# Altium PCB RHD2132_64CH.PcbDoc
Units mm, origin at the board's own origin, x right, y up, seen from the top; angles counter-clockwise.
Board outline 26.67 x 34.29 mm, 6 copper layers (Top Layer, Ground Plane 1, Third Layer, Fourth Layer, Ground Plane 2, Bottom Layer), stack 1.484 mm thick; 15 components, 79 nets, 238 pads, 39 vias.
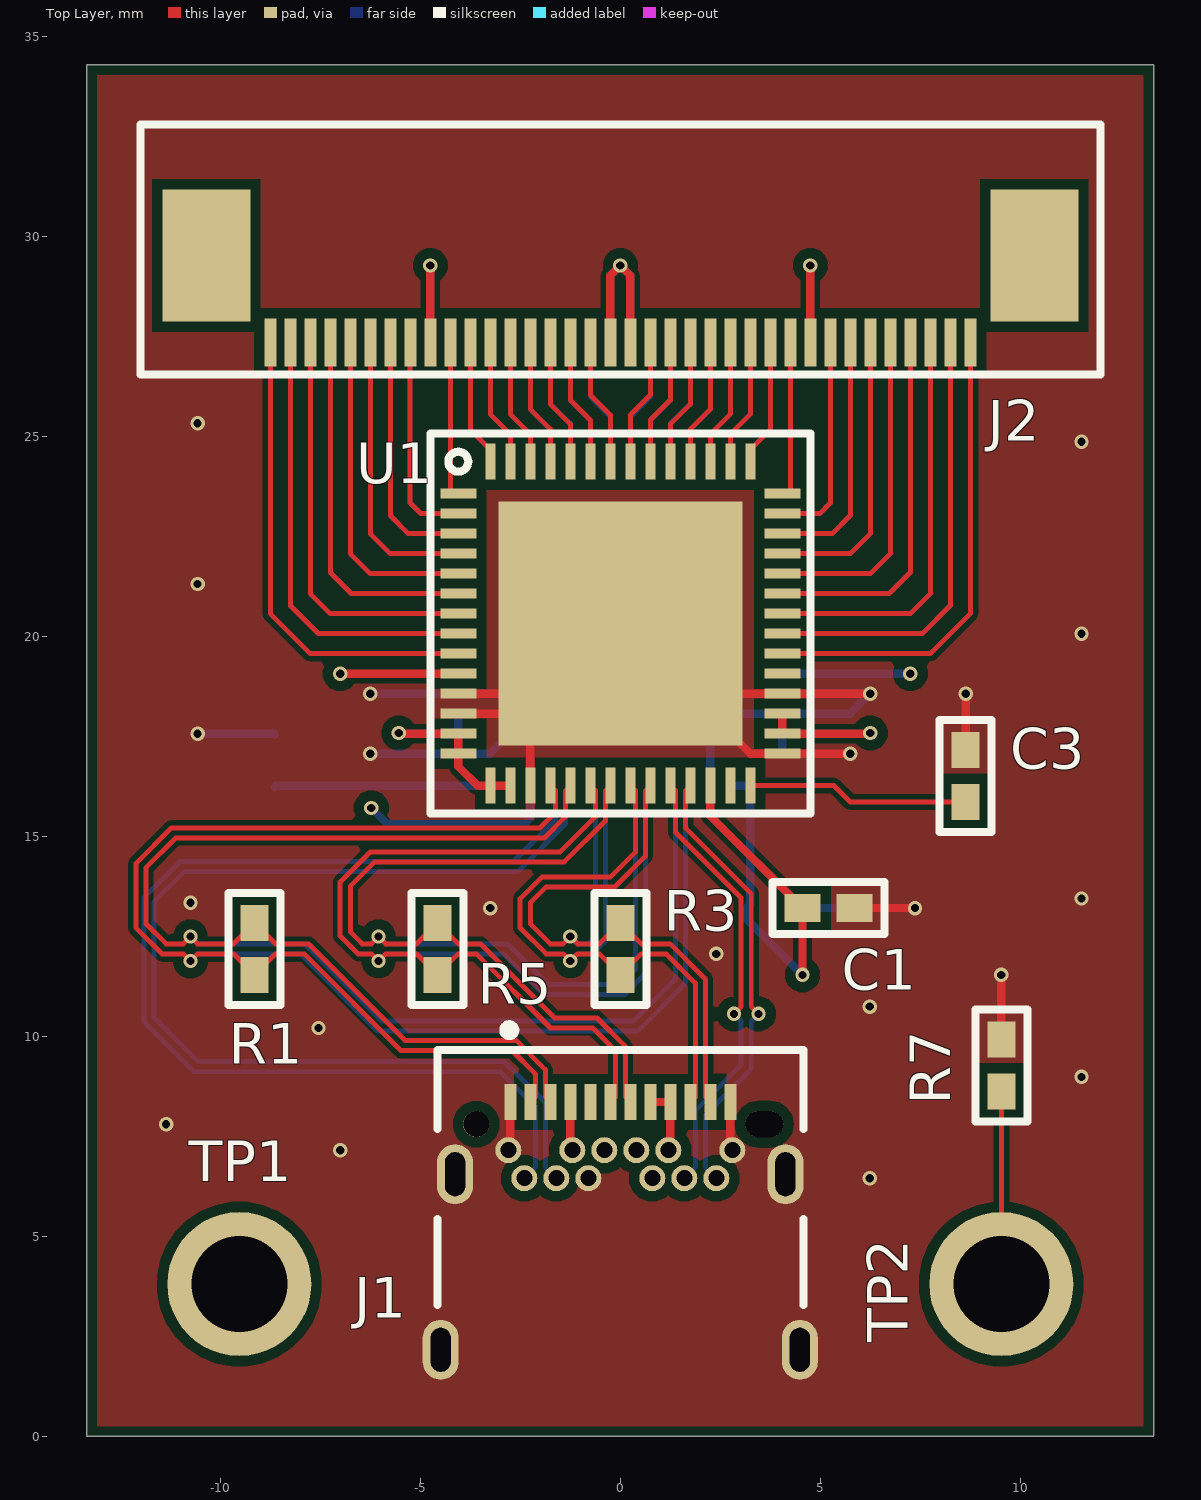
[diagram p0: Top Layer view]
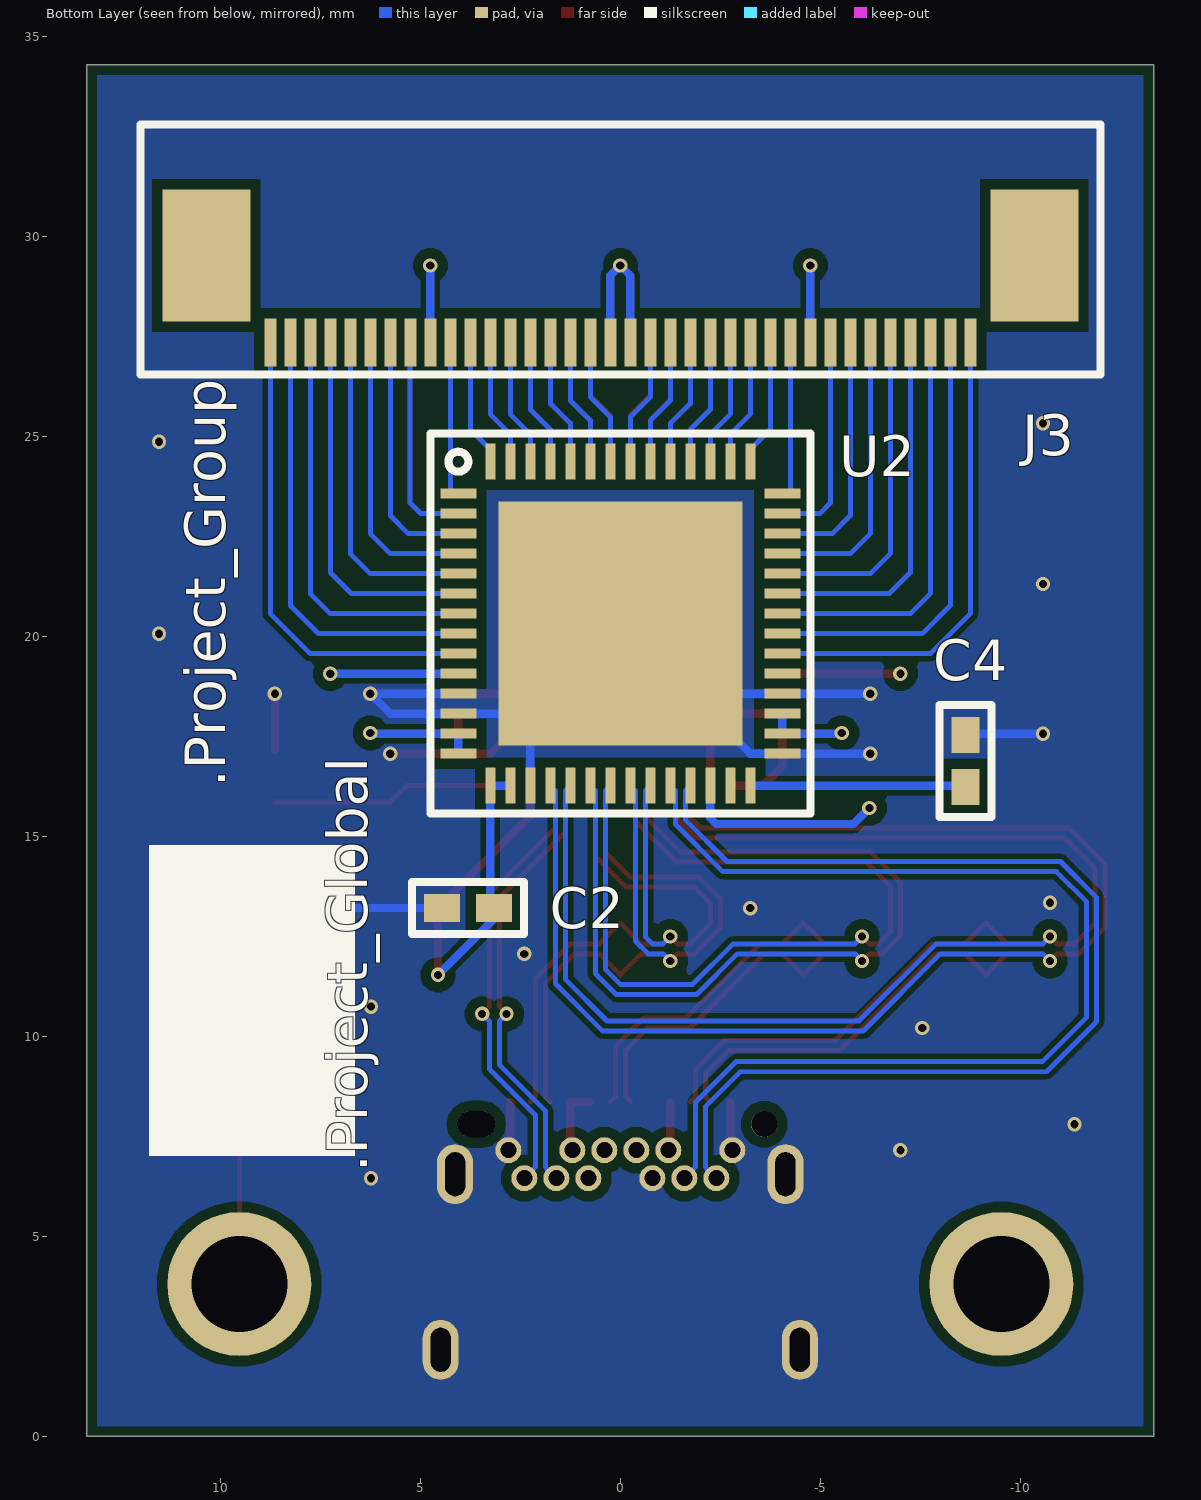
[diagram p1: Bottom Layer view, seen from below]
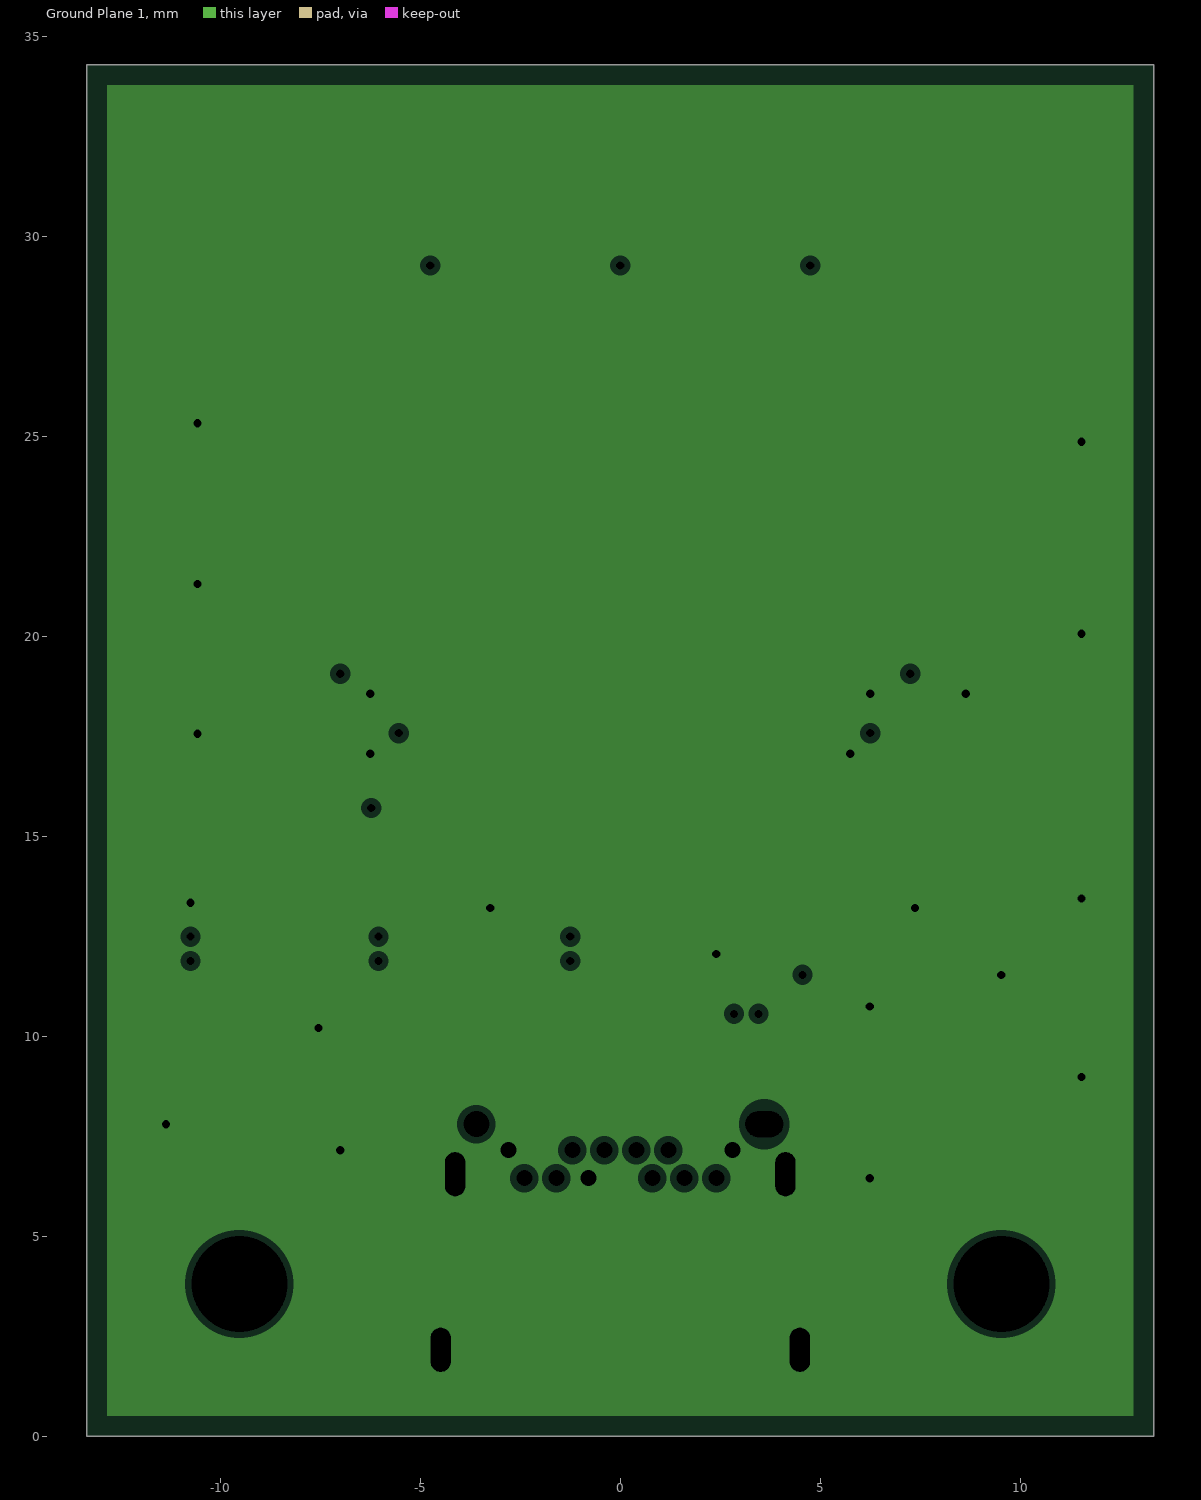
[diagram p2: Ground Plane 1, clearances drawn from the general rule]
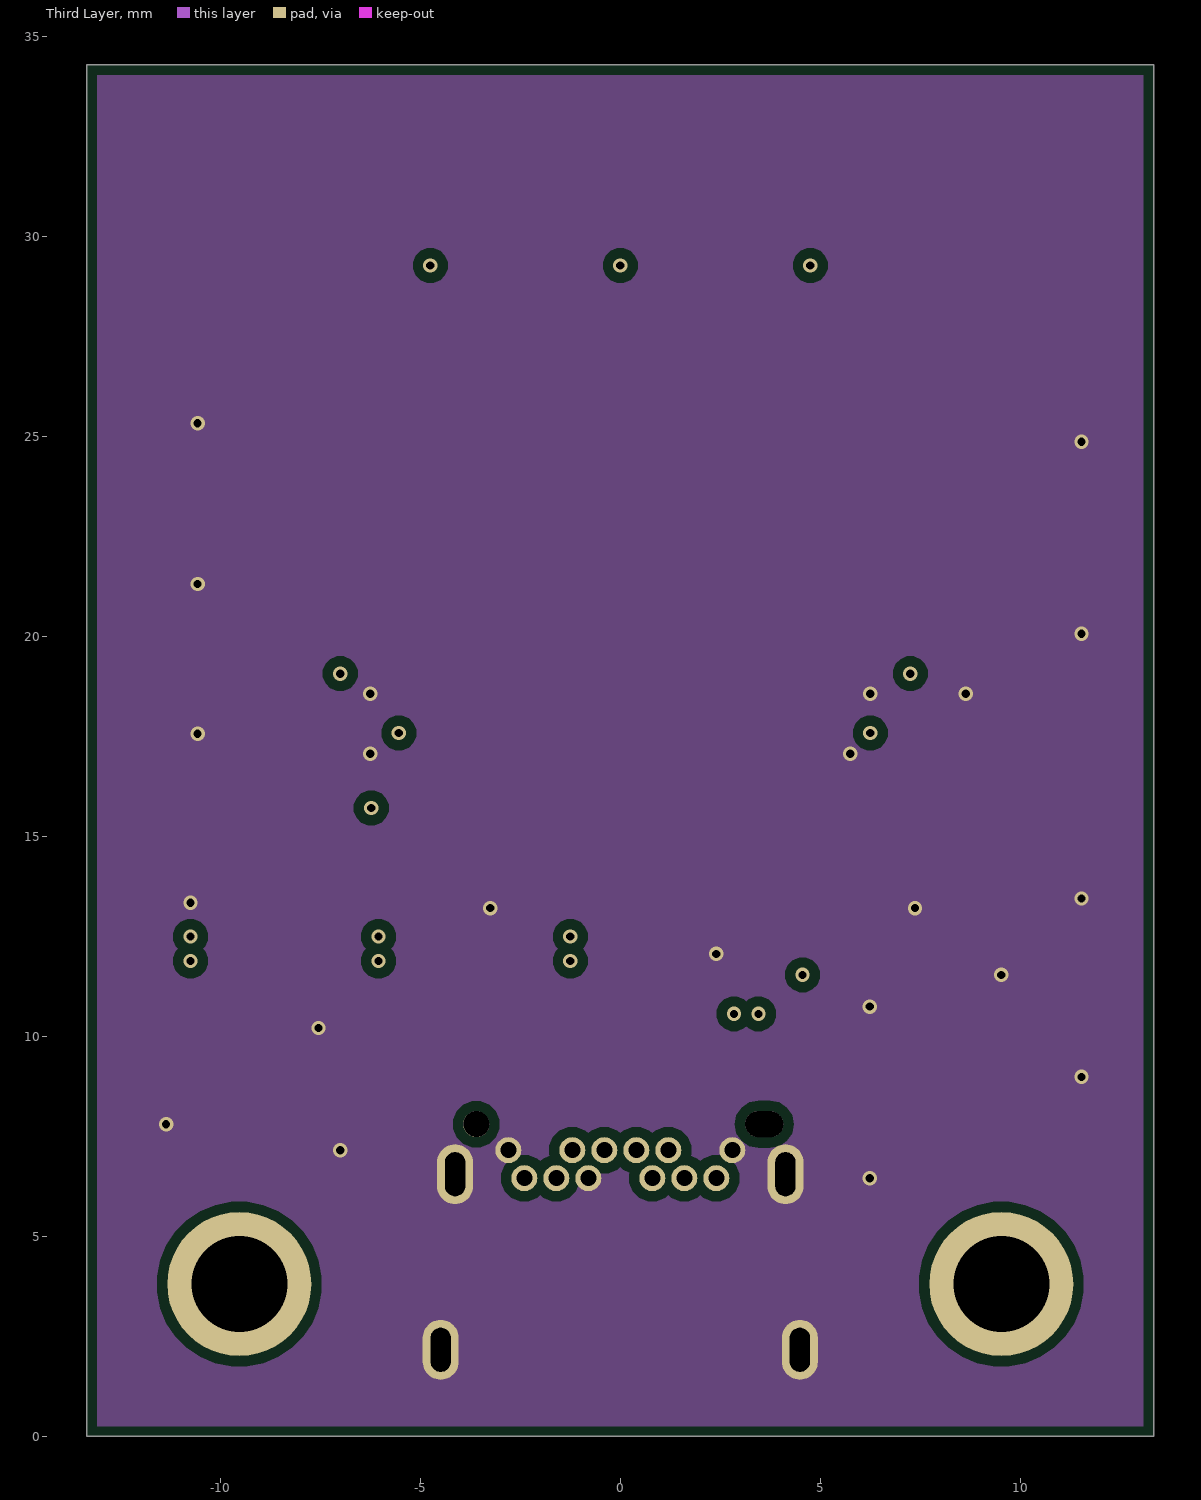
[diagram p3: Third Layer]
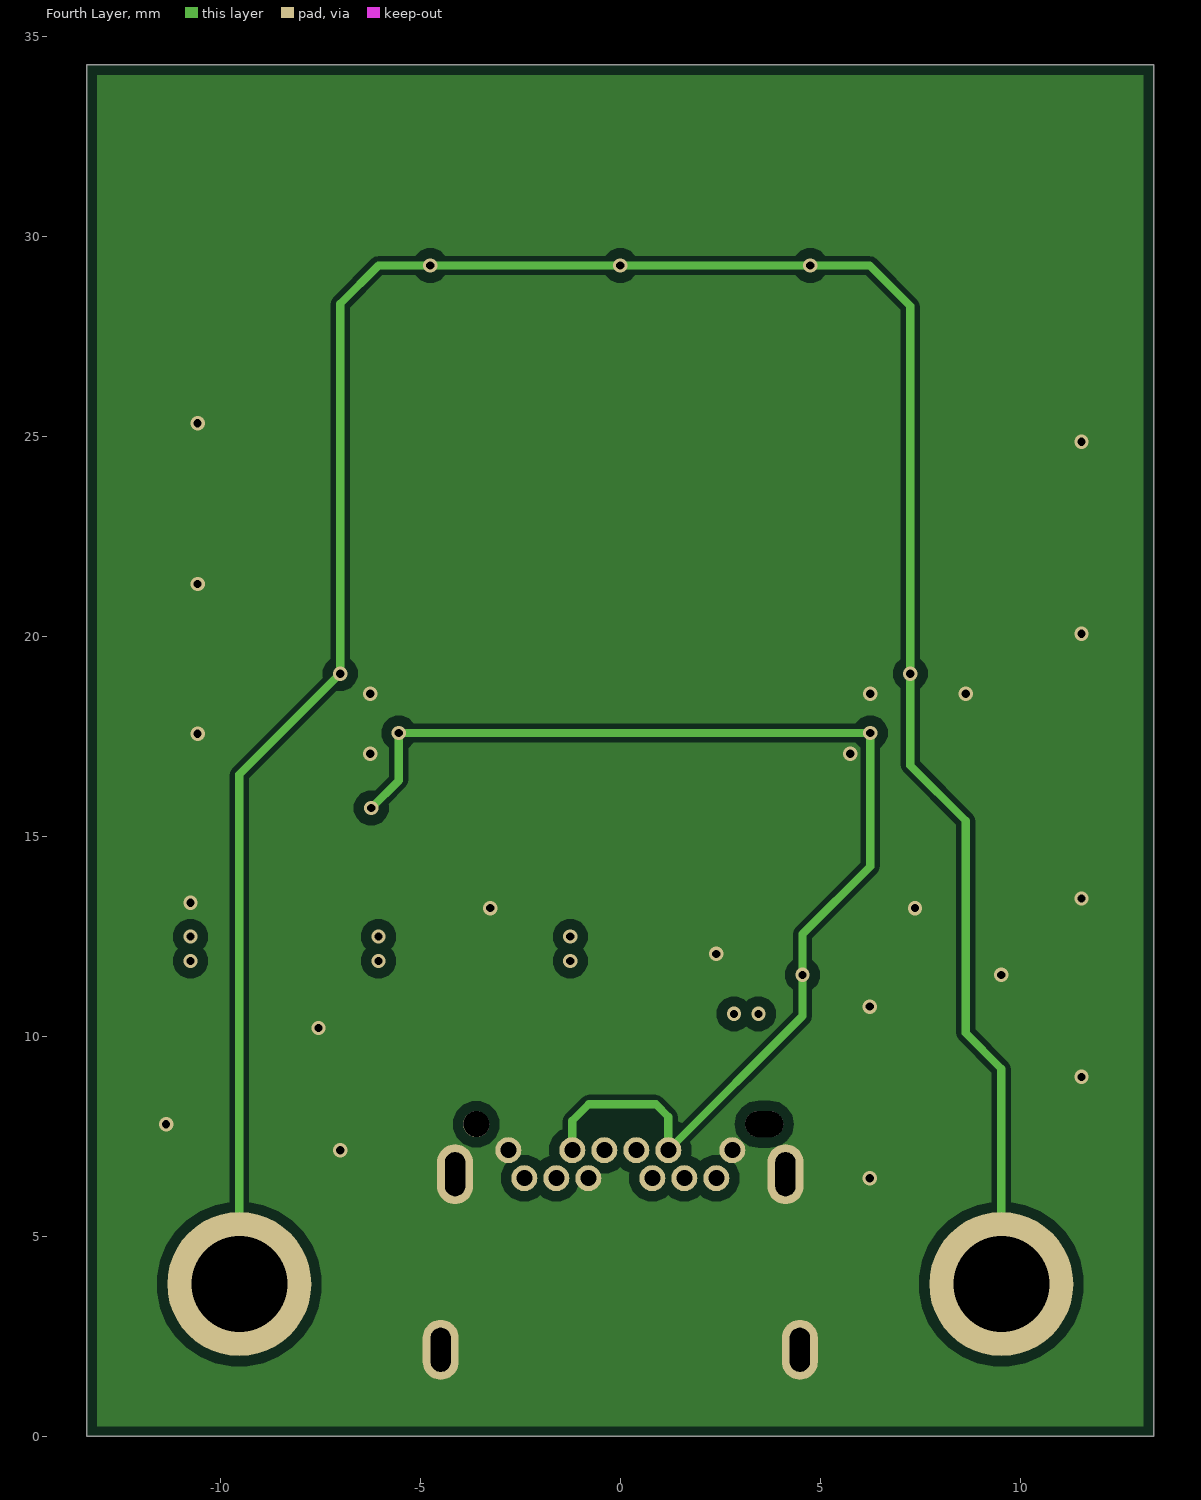
[diagram p4: Fourth Layer]
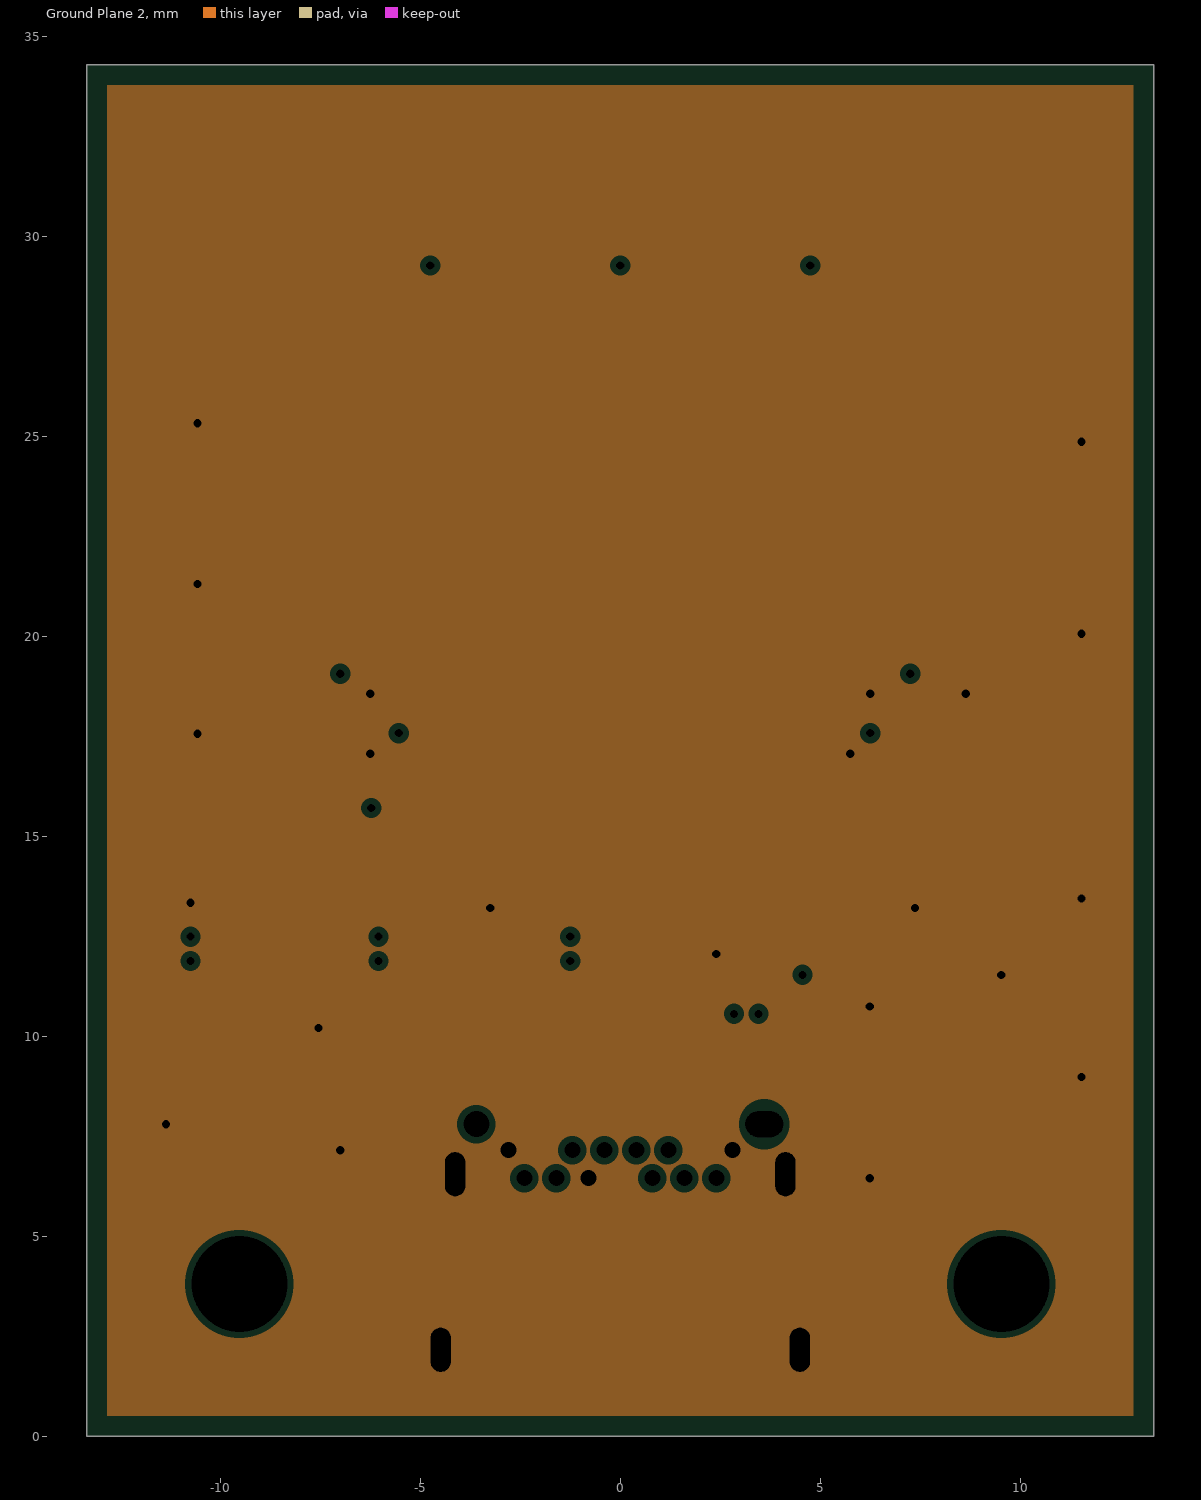
[diagram p5: Ground Plane 2, clearances drawn from the general rule]

## Layer stack, top to bottom
Top Solder: solder mask 0.01, Solder Resist, Dk 3.5
Top Layer: signal copper 0.035
Dielectric 4: prepreg 0.1195, 2116 RC58%, Dk 4.45
Ground Plane 1: plane copper 0.035, net GND
Dielectric 2: core 0.43, Core, Dk 4.6
Third Layer: signal copper 0.035
Dielectric 1: prepreg 0.175, 7628 RC46%, Dk 4.74
Fourth Layer: signal copper 0.035
Dielectric 3: core 0.43, Core, Dk 4.6
Ground Plane 2: plane copper 0.035, net GND
Dielectric 5: prepreg 0.1195, 2116 RC58%, Dk 4.45
Bottom Layer: signal copper 0.035
Bottom Solder: solder mask 0.01, Solder Resist, Dk 3.5

## Board outline
-13.335,0 -13.335,34.29 13.335,34.29 13.335,0

## Design rules (kind name [scope] priority, off if disabled: settings)
AcuteAngle [All] p1: minimum=4.50000000000000E+0001 checktracksonly=FALSE
BoardOutlineClearance [All] p1: gap=0.254 ignorepadtopadclearanceinfootprint=FALSE
Clearance [All] p1: gap=0.254 ignorepadtopadclearanceinfootprint=TRUE except(0.127: Arc-Arc Arc-Track Arc-SMDPad Arc-THPad Arc-Via Arc-Fill Arc-Poly Arc-Region Arc-Text Arc-Hole Track-Track Track-SMDPad Track-THPad Track-Via Track-Fill Track-Poly Track-Region Track-Text Track-Hole)
ComponentClearance [All] p1: gap=0.102 collisioncheckmode=3 verticalgap=0.102 showdistances=FALSE
DiffPairsRouting [All] p1: maxlimit=0.203 minlimit=0.127 mostfreqgap=0.203 toplayer_maxgap=0.127 toplayer_prefgap=0.127 toplayer_minwidth=0.124 toplayer_maxwidth=0.124 toplayer_prefwidth=0.124 midlayer1_minwidth=0.381 midlayer1_maxwidth=0.381 midlayer1_prefwidth=0.381 midlayer2_mingap=0.203 midlayer2_minwidth=0.102 midlayer2_maxwidth=0.102 midlayer2_prefwidth=0.102 bottomlayer_maxgap=0.127 bottomlayer_prefgap=0.127 bottomlayer_minwidth=0.124 bottomlayer_maxwidth=0.124 bottomlayer_prefwidth=0.124 impedanceprofiledriven=TRUE impedanceprofileid={EA2CEC0D-C804-4875-A771-53543DD9646E} maxuncoupledlength=5.08
HoleSize [All] p1: absolutevalues=TRUE maxlimit=25.4 minlimit=0.152 maxpercent=80.000 minpercent=20.000
HoleToHoleClearance [All] p1: gap=0.203 allowstackedmicrovias=FALSE
MatchedLengths [All] p1: tolerance=1.27 checknetsindiffpair=TRUE checkdiffpairvsdiffpair=FALSE checkxsignals=FALSE checkothers=FALSE
MinimumAnnularRing [All] p1: minimumring=0.076
MinimumSolderMaskSliver MinimumSolderMaskSliver_U1 [HasFootprint('RHD2164_BGA')] p1: minsoldermaskwidth=0.025
MinimumSolderMaskSliver [All] p2: minsoldermaskwidth=0.102
PlaneClearance [All] p1: clearance=0.152
PlaneConnect [All] p1: planeconnectstyle=Direct reliefexpansion=0.508 reliefentries=4 reliefconductorwidth=0.254 reliefairgap=0.254
PolygonConnect [All] p1: connectstyle=Direct reliefconductorwidth=0.203 reliefentries=4 polygonreliefangle="90 Angle" airgapwidth=0.102
RoutingLayers [All] p1: top layer_v5=TRUE mid layer 1_v5=FALSE mid layer 2_v5=TRUE bottom layer_v5=TRUE
RoutingVias [All] p1: holewidth=0.203 width=0.356 viastyle="Through Hole" minholewidth=0.152 minwidth=0.356 maxholewidth=0.203 maxwidth=0.356
SilkToSilkClearance [All] p1: silktosilkclearance=0.102
SilkToSolderMaskClearance [IsPad] p1: minsilkscreentomaskgap=0.051 clearancetoexposedcopper=FALSE
SolderMaskExpansion SolderMaskExpansion_Vias [IsVia] p1: expansion=-0.254 istentingtop=TRUE
SolderMaskExpansion [All] p2: expansion=0.051 istentingtop=FALSE
SupplyNets "Schematic Supply Nets_2" [InNet('VDD_3V3')] p1: voltage=0.000
SupplyNets "Schematic Supply Nets_1" [InNet('GND')] p2: voltage=0.000
Width Width_Power [InNetClass('Power')] p1: maxlimit=0.508 minlimit=0.152 preferedwidth=0.203
Width [All] p2: maxlimit=0.381 minlimit=0.127 preferedwidth=0.127 midlayer1_maxwidth=0.254 minimp=50.000000 maximp=50.000000 favimp=50.000000
20 further rules are at their usual default settings.

## Classes and differential pairs
differential pair SCLK: +SCLK_P -SCLK_N
differential pair MOSI: +MOSI_P -MOSI_N
differential pair MISO2: +MISO2_P -MISO2_N
differential pair MISO1: +MISO1_P -MISO1_N
differential pair C\S\: +C\S\_P -C\S\_N

## Components (designator, comment, footprint, x,y, rotation, side; value= is the part's Value field where it differs from the comment)
C1 "100n" 0402_CAPACITOR 5.207,13.208 r180 top
C2 "100n" 0402_CAPACITOR 3.81,13.208 r180 bottom
C3 "10n" 0402_CAPACITOR 8.636,16.51 r270 top
C4 "10n" 0402_CAPACITOR -8.636,16.891 r270 bottom
J1 "217183-0001" FP-217183-0001-MFG 0,4.572 r0 top locked
J2 "3-2492104-6" CON_ZIF_RA_36POS 0,27.354 r180 top locked
J3 "3-2492104-6" CON_ZIF_RA_36POS 0,27.354 r0 bottom locked
R1 "100R" 0402_Resistor -9.144,12.192 r90 top
R3 "100R" 0402_Resistor 0,12.192 r90 top
R5 "100R" 0402_Resistor -4.572,12.192 r90 top
R7 "0R00" 0402_Resistor 9.525,9.271 r270 top
TP1 "TP_Small" TP_Small_M2 -9.525,3.81 r0 top
TP2 "TP_Small" TP_Small_M2 9.525,3.81 r0 top
U1 "RHD2132" QFN-56 0,20.32 r0 top locked
U2 "RHD2132" QFN-56 0,20.32 r180 bottom locked

## Footprints (in the part's own frame and the unit in brackets; to place one, negate y for a bottom-side part, rotate by r counter-clockwise, add the part's x,y. Pads: shape width x height; smd on the part's side, far side on the other; paste and mask are expansions set on the pad)
0402_CAPACITOR [mm]
  rect 0.9x0.7 smd: 1(-0.65,0) 2(0.65,0)
  silkscreen extent -1.4,-0.65 1.4,0.65
0402_Resistor [mm]
  rect 0.9x0.7 smd: 1(-0.65,0) 2(0.65,0)
  silkscreen extent -1.4,-0.65 1.4,0.65
CON_ZIF_RA_36POS [mm] "3-2492104-6 / 36 Position FPC Connector Contacts, Bottom 0.020\" (0.50mm) Surface Mount, Right Angle"
  rect 0.3x1.2 smd mask+0.025: 1(-8.75,0) 2(-8.25,0) 3(-7.75,0) 4(-7.25,0) 5(-6.75,0) 6(-6.25,0) 7(-5.75,0) 8(-5.25,0) 9(-4.75,0) 10(-4.25,0) 11(-3.75,0) 12(-3.25,0) 13(-2.75,0) 14(-2.25,0) 15(-1.75,0) 16(-1.25,0) 17(-0.75,0) 18(-0.25,0) 19(0.25,0) 20(0.75,0) 21(1.25,0) 22(1.75,0) 23(2.25,0) 24(2.75,0) 25(3.25,0) 26(3.75,0) 27(4.25,0) 28(4.75,0) 29(5.25,0) 30(5.75,0) 31(6.25,0) 32(6.75,0) 33(7.25,0) 34(7.75,0) 35(8.25,0) 36(8.75,0)
  rect 2.2x3.3 smd mask+0.025: M1(-10.35,-2.17) M2(10.35,-2.17)
  silkscreen extent -12,-5.45 12,0.8, body extent -11.8,-5.25 11.8,0.5, height 2
FP-217183-0001-MFG [mm]
  rrect100% 0.9x1.5 hole 1.1 slot 0.5 at 0 deg paste-2539.97 mask+0: 1(-4.13,1.985) 2(4.13,1.985) 3(-4.49,-2.405) 4(4.49,-2.405)
  rect 0.3x0.9 smd paste+0 mask+0: A1(-2.75,3.795) A2(-2.25,3.795) A3(-1.75,3.795) A4(-1.25,3.795) A5(-0.75,3.795) A6(-0.25,3.795) A7(0.25,3.795) A8(0.75,3.795) A9(1.25,3.795) A10(1.75,3.795) A11(2.25,3.795) A12(2.75,3.795)
  round 0.65 hole 0.4 paste-2539.97 mask+0: B1(2.8,2.585) B2(2.4,1.885) B3(1.6,1.885) B4(1.2,2.585) B5(0.8,1.885) B6(0.4,2.585) B7(-0.4,2.585) B8(-0.8,1.885) B9(-1.2,2.585) B10(-1.6,1.885) B11(-2.4,1.885) B12(-2.8,2.585)
  round 0.65 hole 0.65 unplated paste-2539.97 mask+0: ""(-3.6,3.235)
  rrect100% 0.95x0.65 hole 0.65 slot 0.95 at 0 deg unplated paste-2539.97 mask+0: ""(3.6,3.235)
  silkscreen extent -4.57,-1.28 4.57,5.71, body extent -5.04,-5.19 5.04,5.19, height 0.25
QFN-56 [mm] "56 Pin QFN Package"
  rect 0.9x0.25 smd mask+0.051: 1(-4.05,3.25) 2(-4.05,2.75) 3(-4.05,2.25) 4(-4.05,1.75) 5(-4.05,1.25) 6(-4.05,0.75) 7(-4.05,0.25) 8(-4.05,-0.25) 9(-4.05,-0.75) 10(-4.05,-1.25) 11(-4.05,-1.75) 12(-4.05,-2.25) 13(-4.05,-2.75) 14(-4.05,-3.25) 29(4.05,-3.25) 30(4.05,-2.75) 31(4.05,-2.25) 32(4.05,-1.75) 33(4.05,-1.25) 34(4.05,-0.75) 35(4.05,-0.25) 36(4.05,0.25) 37(4.05,0.75) 38(4.05,1.25) 39(4.05,1.75) 40(4.05,2.25) 41(4.05,2.75) 42(4.05,3.25)
  rect 0.25x0.9 smd mask+0.051: 15(-3.25,-4.05) 16(-2.75,-4.05) 17(-2.25,-4.05) 18(-1.75,-4.05) 19(-1.25,-4.05) 20(-0.75,-4.05) 21(-0.25,-4.05) 22(0.25,-4.05) 23(0.75,-4.05) 24(1.25,-4.05) 25(1.75,-4.05) 26(2.25,-4.05) 27(2.75,-4.05) 28(3.25,-4.05) 43(3.25,4.05) 44(2.75,4.05) 45(2.25,4.05) 46(1.75,4.05) 47(1.25,4.05) 48(0.75,4.05) 49(0.25,4.05) 50(-0.25,4.05) 51(-0.75,4.05) 52(-1.25,4.05) 53(-1.75,4.05) 54(-2.25,4.05) 55(-2.75,4.05) 56(-3.25,4.05)
  rect 6.1x6.1 smd mask+0.051: 57(0,0)
  silkscreen extent -4.75,-4.75 4.75,4.75, body extent -4,-4 4,4, height 0.85
TP_Small_M2 [mm]
  round 3.6 hole 2.4: 1(0,0)

## Part data
C1 C2 C3 C4: library part Capacitor, "Capacitor"
J1: library part CON_USBC_TH_SMT, "USB-C (USB TYPE-C) USB 3.2 Gen 1 (USB 3.1 Gen 1, Superspeed (USB 3.0)) Receptacle Connector 24 Position Through Hole, Right Angle"
J2 J3: library part CON_ZIF_RA_36POS, "36 Position FPC Connector Contacts, Bottom 0.020\" (0.50mm) Surface Mount, Right Angle", GRAMS Lib Spec=2.7
R1 R3 R5 R7: library part Resistor, "Resistor", GRAMS Lib Spec=2.7
TP1 TP2: "Through Hole Test Point - M2"
U1 U2: library part IC_RHD2132, "INTAN RHD2132 - 56-QFN", GRAMS Lib Spec=2.7

## Via types
v1: diameter 0.356, hole 0.203, Top Layer to Bottom Layer, tented both sides, 39 vias

## Nets (pads, with @x,y where several pads share a name; then routed paths per layer and width w, separated by ;. In a path a pad name is that pad's centre, name@x,y a point inside that pad or via, vN(x,y) a via of type N, cw(c..) or ccw(c..) an arc to the next point about the centre after c; other vN are vias at no path point)
C\S\_N: J1.A2 R1.1 U1.18 U2.18 | length 44.9
  Top Layer w0.124: J1.A2 -2.126,8.491 -2.126,9.068 -2.709,9.651 -5.485,9.651 -7.901,12.066 -8.62,12.066 R1.1 -9.668,12.066 -10.565,12.066 v1(-10.744,11.887) -10.923,12.066 -11.458,12.066 -12.113,12.722 -12.113,14.32 -11.219,15.215 -2.007,15.215 -1.626,15.596 -1.626,16.146 U1.18
  Bottom Layer w0.124: v1(-10.744,11.887) -10.565,12.066 -8.001,12.066 -6.069,10.135 0.437,10.135 1.626,11.323 1.626,16.146 U2.18
C\S\_P: J1.A3 R1.2 U1.19 U2.19 | length 44.5
  Top Layer w0.124: J1.A3 -1.874,8.491 -1.874,9.172 -2.605,9.902 -5.381,9.902 -7.797,12.318 -8.62,12.318 R1.2 -9.668,12.318 -10.565,12.318 v1(-10.744,12.497) -10.923,12.318 -11.354,12.318 -11.862,12.826 -11.862,14.216 -11.115,14.963 -1.903,14.963 -1.374,15.491 -1.374,16.146 U1.19
  Bottom Layer w0.124: v1(-10.744,12.497) -10.565,12.318 -7.897,12.318 -5.965,10.386 0.333,10.386 1.374,11.427 1.374,16.146 U2.19
GND: C1.1 C2.1 C3.1 C4.1 J1.1 J1.2 J1.3 J1.4 J1.A1 J1.A12 J1.B1 J1.B8 J1.B12 R7.1 U1.11 U1.12 U1.17 U1.29 U1.32 U1.57 U2.11 U2.12 U2.17 U2.29 U2.32 U2.57 | length 47.2
  Top Layer w0.203: U1.12 -2.25,18.07 U1.17 ; U1.11 -1.75,18.57 U1.57 ; J1.B12 -2.75,7.207 J1.A1 ; J1.A12 2.75,7.207 J1.B1 ; v1(5.75,17.07) U1.29 3.25,17.07 1.75,18.57 U1.32 v1(6.25,18.57) ; C1.1 v1(7.366,13.208) ; C3.1 v1(8.636,18.57) ; R7.1 v1(9.525,11.542)
  Bottom Layer w0.203: v1(-10.566,17.57) -8.665,17.57 C4.1 ; v1(-6.25,17.07) U2.29 -3.25,17.07 -1.75,18.57 U2.32 v1(-6.25,18.57) ; U2.17 2.25,18.07 U2.12 5.75,18.07 v1(6.25,18.57) U2.11 ; C2.1 v1(7.366,13.208)
  other v1: 6.235,6.457 -7.001,7.157 -11.354,7.807 11.532,8.992 -7.548,10.211 6.235,10.745 2.4,12.066 -3.25,13.208 -10.744,13.343 11.532,13.447 11.532,20.07 -10.566,21.311 11.532,24.87 -10.566,25.331
INPUT0: J2.36 U1.9 | length 11.9
  Top Layer w0.127: J2.36 -8.75,20.57 -7.75,19.57 U1.9
INPUT1: J2.35 U1.8 | length 11.1
  Top Layer w0.127: J2.35 -8.25,20.772 -7.548,20.07 U1.8
INPUT2: J2.34 U1.7 | length 10.2
  Top Layer w0.127: J2.34 -7.75,21.07 -7.25,20.57 U1.7
INPUT3: J2.33 U1.6 | length 9.2
  Top Layer w0.127: J2.33 -7.25,21.601 -6.719,21.07 U1.6
INPUT4: J2.32 U1.5 | length 8.2
  Top Layer w0.127: J2.32 -6.75,22.07 -6.25,21.57 U1.5
INPUT5: J2.31 U1.4 | length 7.2
  Top Layer w0.127: J2.31 -6.25,22.57 -5.75,22.07 U1.4
INPUT6: J2.30 U1.3 | length 6.2
  Top Layer w0.127: J2.30 -5.75,23.022 -5.298,22.57 U1.3
INPUT7: J2.29 U1.2 | length 5.3
  Top Layer w0.127: J2.29 -5.258,27.346 -5.258,23.343 -4.985,23.07 U1.2
INPUT8: J2.27 U1.1 | length 4
  Top Layer w0.127: J2.27 -4.25,23.57 U1.1
INPUT9: J2.26 U1.56 | length 3.2
  Top Layer w0.127: J2.26 -3.75,25.167 -3.25,24.667 U1.56
INPUT10: J2.25 U1.55 | length 3.2
  Top Layer w0.127: J2.25 -3.25,25.558 -2.75,25.058 U1.55
INPUT11: J2.24 U1.54 | length 3.2
  Top Layer w0.127: J2.24 -2.75,25.558 -2.25,25.058 U1.54
INPUT12: J2.23 U1.53 | length 3.2
  Top Layer w0.127: J2.23 -2.25,25.682 -1.75,25.182 U1.53
INPUT13: J2.22 U1.52 | length 3.2
  Top Layer w0.127: J2.22 -1.75,25.807 -1.25,25.307 U1.52
INPUT14: J2.21 U1.51 | length 3.2
  Top Layer w0.127: J2.21 -1.25,25.914 -0.75,25.414 U1.51
INPUT15: J2.20 U1.50 | length 3.2
  Top Layer w0.127: J2.20 -0.75,26.038 -0.25,25.538 U1.50
INPUT16: J2.17 U1.49 | length 3.2
  Top Layer w0.127: U1.49 0.25,25.538 0.75,26.038 J2.17
INPUT17: J2.16 U1.48 | length 3.2
  Top Layer w0.127: U1.48 0.75,25.414 1.25,25.914 J2.16
INPUT18: J2.15 U1.47 | length 3.2
  Top Layer w0.127: U1.47 1.25,25.307 1.75,25.807 J2.15
INPUT19: J2.14 U1.46 | length 3.2
  Top Layer w0.127: U1.46 1.75,25.182 2.25,25.682 J2.14
INPUT20: J2.13 U1.45 | length 3.2
  Top Layer w0.127: U1.45 2.25,25.058 2.75,25.558 J2.13
INPUT21: J2.12 U1.44 | length 3.2
  Top Layer w0.127: U1.44 2.75,25.058 3.25,25.558 J2.12
INPUT22: J2.11 U1.43 | length 3.2
  Top Layer w0.127: U1.43 3.25,24.667 3.75,25.167 J2.11
INPUT23: J2.10 U1.42 | length 4
  Top Layer w0.127: U1.42 4.25,23.57 J2.10
INPUT24: J2.8 U1.41 | length 5.3
  Top Layer w0.127: U1.41 4.985,23.07 5.258,23.343 5.258,27.346 J2.8
INPUT25: J2.7 U1.40 | length 6.2
  Top Layer w0.127: U1.40 5.298,22.57 5.75,23.022 J2.7
INPUT26: J2.6 U1.39 | length 7.2
  Top Layer w0.127: U1.39 5.75,22.07 6.25,22.57 J2.6
INPUT27: J2.5 U1.38 | length 8.2
  Top Layer w0.127: U1.38 6.25,21.57 6.75,22.07 J2.5
INPUT28: J2.4 U1.37 | length 9.2
  Top Layer w0.127: U1.37 6.719,21.07 7.25,21.601 J2.4
INPUT29: J2.3 U1.36 | length 10.2
  Top Layer w0.127: U1.36 7.25,20.57 7.75,21.07 J2.3
INPUT30: J2.2 U1.35 | length 11.1
  Top Layer w0.127: U1.35 7.548,20.07 8.25,20.772 J2.2
INPUT31: J2.1 U1.34 | length 11.9
  Top Layer w0.127: U1.34 7.75,19.57 8.75,20.57 J2.1
INPUT32: J3.36 U2.9 | length 11.9
  Bottom Layer w0.127: U2.9 7.75,19.57 8.75,20.57 J3.36
INPUT33: J3.35 U2.8 | length 11.1
  Bottom Layer w0.127: U2.8 7.548,20.07 8.25,20.772 J3.35
INPUT34: J3.34 U2.7 | length 10.2
  Bottom Layer w0.127: U2.7 7.25,20.57 7.75,21.07 J3.34
INPUT35: J3.33 U2.6 | length 9.2
  Bottom Layer w0.127: U2.6 6.719,21.07 7.25,21.601 J3.33
INPUT36: J3.32 U2.5 | length 8.2
  Bottom Layer w0.127: U2.5 6.25,21.57 6.75,22.07 J3.32
INPUT37: J3.31 U2.4 | length 7.2
  Bottom Layer w0.127: U2.4 5.75,22.07 6.25,22.57 J3.31
INPUT38: J3.30 U2.3 | length 6.2
  Bottom Layer w0.127: U2.3 5.298,22.57 5.75,23.022 J3.30
INPUT39: J3.29 U2.2 | length 5.3
  Bottom Layer w0.127: U2.2 4.985,23.07 5.258,23.343 5.258,27.346 J3.29
INPUT40: J3.27 U2.1 | length 4
  Bottom Layer w0.127: U2.1 4.25,23.57 J3.27
INPUT41: J3.26 U2.56 | length 3.2
  Bottom Layer w0.127: U2.56 3.25,24.392 3.25,24.675 3.75,25.175 J3.26
INPUT42: J3.25 U2.55 | length 3.2
  Bottom Layer w0.127: U2.55 2.75,25.058 3.25,25.558 J3.25
INPUT43: J3.24 U2.54 | length 3.2
  Bottom Layer w0.127: U2.54 2.25,25.058 2.75,25.558 J3.24
INPUT44: J3.23 U2.53 | length 3.2
  Bottom Layer w0.127: U2.53 1.75,25.175 2.25,25.675 J3.23
INPUT45: J3.22 U2.52 | length 3.2
  Bottom Layer w0.127: U2.52 1.25,25.331 1.75,25.831 J3.22
INPUT46: J3.21 U2.51 | length 3.2
  Bottom Layer w0.127: U2.51 0.75,25.399 1.25,25.899 J3.21
INPUT47: J3.20 U2.50 | length 3.2
  Bottom Layer w0.127: U2.50 0.25,25.487 0.75,25.987 J3.20
INPUT48: J3.17 U2.49 | length 3.2
  Bottom Layer w0.127: J3.17 -0.75,25.987 -0.25,25.487 U2.49
INPUT49: J3.16 U2.48 | length 3.2
  Bottom Layer w0.127: J3.16 -1.25,25.899 -0.75,25.399 U2.48
INPUT50: J3.15 U2.47 | length 3.2
  Bottom Layer w0.127: J3.15 -1.75,25.831 -1.25,25.331 U2.47
INPUT51: J3.14 U2.46 | length 3.2
  Bottom Layer w0.127: J3.14 -2.25,25.675 -1.75,25.175 U2.46
INPUT52: J3.13 U2.45 | length 3.2
  Bottom Layer w0.127: J3.13 -2.75,25.558 -2.25,25.058 U2.45
INPUT53: J3.12 U2.44 | length 3.2
  Bottom Layer w0.127: J3.12 -3.25,25.558 -2.75,25.058 U2.44
INPUT54: J3.11 U2.43 | length 3.2
  Bottom Layer w0.127: J3.11 -3.75,25.175 -3.25,24.675 -3.25,24.392 U2.43
INPUT55: J3.10 U2.42 | length 4.2
  Bottom Layer w0.127: J3.10 U2.42@-4.25,23.57 ; U2.42@-4.25,23.57 U2.42 U2.42@-4.25,23.57
INPUT56: J3.8 U2.41 | length 5.3
  Bottom Layer w0.127: J3.8@-5.258,27.346 -5.258,23.343 -4.985,23.07 U2.41
INPUT57: J3.7 U2.40 | length 6.2
  Bottom Layer w0.127: J3.7 -5.75,23.022 -5.298,22.57 U2.40
INPUT58: J3.6 U2.39 | length 7.2
  Bottom Layer w0.127: J3.6 -6.25,22.57 -5.75,22.07 U2.39
INPUT59: J3.5 U2.38 | length 8.2
  Bottom Layer w0.127: J3.5 -6.75,22.07 -6.25,21.57 U2.38
INPUT60: J3.4 U2.37 | length 9.2
  Bottom Layer w0.127: J3.4 -7.25,21.601 -6.719,21.07 U2.37
INPUT61: J3.3 U2.36 | length 10.2
  Bottom Layer w0.127: J3.3 -7.75,21.07 -7.25,20.57 U2.36
INPUT62: J3.2 U2.35 | length 11.1
  Bottom Layer w0.127: J3.2 -8.25,20.772 -7.548,20.07 U2.35
INPUT63: J3.1 U2.34 | length 11.9
  Bottom Layer w0.127: J3.1 -8.75,20.57 -7.75,19.57 U2.34
MISO1_N: J1.B3 U1.24 | length 11.3
  Top Layer w0.124: U1.24 1.374,16.146 1.374,15.11 3.023,13.462 3.023,10.745 v1(2.844,10.566)
  Bottom Layer w0.124: J1.B3 1.874,6.731 1.874,8.141 3.023,9.29 3.023,10.387 v1(2.844,10.566)
MISO1_P: J1.B2 U1.25 | length 11.3
  Top Layer w0.124: U1.25 1.626,16.146 1.626,15.214 3.274,13.566 3.274,10.745 v1(3.453,10.566)
  Bottom Layer w0.124: J1.B2 2.126,6.731 2.126,8.037 3.274,9.185 3.274,10.387 v1(3.453,10.566)
MISO2_N: J1.B10 U2.24 | length 27.7
  Bottom Layer w0.124: J1.B10 -1.874,6.731 -1.874,8.351 -2.893,9.37 -10.551,9.37 -11.659,10.478 -11.659,13.365 -10.901,14.122 -2.566,14.122 -1.374,15.314 -1.374,16.146 U2.24
MISO2_P: J1.B11 U2.25 | length 27.7
  Bottom Layer w0.124: J1.B11 -2.126,6.731 -2.126,8.247 -2.997,9.119 -10.655,9.119 -11.91,10.374 -11.91,13.469 -11.005,14.374 -2.67,14.374 -1.626,15.418 -1.626,16.146 U2.25
MOSI_N: J1.A10 R3.1 U1.22 U2.22 | length 19.4
  Top Layer w0.124: U1.22 0.374,16.146 0.374,14.609 -0.25,13.985 -1.964,13.985 -2.501,13.447 -2.501,12.714 -1.854,12.066 -1.429,12.066 v1(-1.25,11.887) -1.071,12.066 -0.524,12.066 R3.1 0.524,12.066 1.143,12.066 1.874,11.335 1.874,8.491 J1.A10
  Bottom Layer w0.124: v1(-1.25,11.887) -1.071,12.066 -0.696,12.066 -0.374,12.388 -0.374,15.522 -0.374,16.146 U2.22
MOSI_P: J1.A11 R3.2 U1.23 U2.23 | length 19
  Top Layer w0.124: U1.23 0.626,16.146 0.626,14.505 -0.146,13.734 -1.859,13.734 -2.25,13.343 -2.25,12.818 -1.75,12.318 -1.429,12.318 v1(-1.25,12.497) -1.071,12.318 -0.524,12.318 R3.2 0.524,12.318 1.247,12.318 2.126,11.439 2.126,8.491 J1.A11
  Bottom Layer w0.124: v1(-1.25,12.497) -1.071,12.318 -0.8,12.318 -0.626,12.492 -0.626,15.418 -0.626,16.146 U2.23
NetC3_2: C3.2 U1.28 | length 5.6
  Top Layer w0.127: U1.28 5.34,16.27 5.75,15.86 C3.2
NetC4_2: C4.2 U2.28 | length 5.4
  Bottom Layer w0.203: C4.2 -8.607,16.27 U2.28
REF: J2.9 J2.18 J2.19 J2.28 J3.9 J3.18 J3.19 J3.28 R7.2 TP1.1 TP2.1 U1.10 U2.10 | length 92.7
  Top Layer w0.127: TP2.1 R7.2
  Top Layer w0.203: v1(-7.001,19.07) U1.10 ; J2.28 v1(-4.75,29.274) ; J2.19 -0.25,29.024 v1(0,29.274) 0.25,29.024 J2.18 ; J2.9 v1(4.75,29.274)
  Fourth Layer w0.203: TP1.1 -9.525,16.546 v1(-7.001,19.07) -7.001,28.318 -6.045,29.274 v1(-4.75,29.274) v1(0,29.274) v1(4.75,29.274) 6.235,29.274 7.25,28.259 v1(7.25,19.07) 7.25,16.778 8.636,15.392 8.636,10.084 9.525,9.195 TP2.1
  Bottom Layer w0.203: J3.9 v1(-4.75,29.274) ; J3.18 -0.25,29.024 v1(0,29.274) 0.25,29.024 J3.19 ; U2.10 v1(7.25,19.07) ; J3.28 v1(4.75,29.274)
SCLK_N: J1.A6 R5.1 U1.20 U2.20 | length 31.3
  Top Layer w0.124: U1.20 -0.626,16.146 -0.626,15.491 -1.501,14.616 -6.247,14.616 -7.001,13.861 -7.001,12.512 -6.556,12.066 -6.224,12.066 v1(-6.045,11.887) -5.866,12.066 -5.096,12.066 R5.1 -4.048,12.066 -3.6,12.066 -1.745,10.211 -0.686,10.211 -0.126,9.651 -0.126,8.491 J1.A6
  Bottom Layer w0.124: v1(-6.045,11.887) -5.866,12.066 -2.924,12.066 -1.91,11.052 0.104,11.052 0.626,11.573 0.626,16.146 U2.20
SCLK_P: J1.A7 R5.2 U1.21 U2.21 | length 30.9
  Top Layer w0.124: U1.21 -0.374,16.146 -0.374,15.387 -1.397,14.365 -6.142,14.365 -6.75,13.757 -6.75,12.616 -6.452,12.318 -6.224,12.318 v1(-6.045,12.497) -5.866,12.318 -5.096,12.318 R5.2 -4.048,12.318 -3.496,12.318 -1.64,10.462 -0.582,10.462 0.126,9.755 0.126,8.491 J1.A7
  Bottom Layer w0.124: v1(-6.045,12.497) -5.866,12.318 -2.82,12.318 -1.805,11.303 0,11.303 0.374,11.677 0.374,16.146 U2.21
VDD_3V3: C1.2 C2.2 J1.A4 J1.A8 J1.A9 J1.B4 J1.B9 U1.13 U1.14 U1.15 U1.16 U1.26 U1.30 U1.31 U2.13 U2.14 U2.15 U2.16 U2.26 U2.30 U2.31 | length 61.5
  Top Layer w0.203: v1(-5.537,17.585) -5.522,17.57 U1.13 U1.14 -4.05,16.749 -3.571,16.27 U1.15 U1.16 ; J1.A4 -1.25,7.207 J1.B9 ; J1.A8 J1.A9 1.25,7.207 J1.B4 ; U1.26 2.25,15.515 C1.2 v1(4.557,11.542) ; U1.31 U1.30 6.235,17.57 v1(6.25,17.585)
  Fourth Layer w0.203: v1(-6.226,15.714) -5.537,16.403 v1(-5.537,17.585) v1(6.25,17.585) 6.25,14.251 4.557,12.558 v1(4.557,11.542) 4.557,10.514 J1.B4 1.2,7.995 0.889,8.306 -0.787,8.306 -1.2,7.893 J1.B9
  Bottom Layer w0.203: v1(-6.226,15.714) -5.826,15.314 -2.4,15.314 -2.25,15.464 U2.26 ; v1(-5.537,17.585) -5.522,17.57 U2.30 U2.31 ; U2.16 U2.15 3.25,13.298 C2.2 3.16,12.939 v1(4.557,11.542) ; U2.14 U2.13 6.235,17.57 v1(6.25,17.585)
pads on no net: J1. J1.A5 J1.B5 J1.B6 J1.B7 J2.M1 J2.M2 J3.M1 J3.M2 U1.27 U1.33 U2.27 U2.33

## Polygon pours and split planes (outlines as drawn)
GND on Bottom Layer "GND_BOT" (solid, remove dead copper, pour order 3): -13.335,34.29 -13.335,0 13.335,0 13.335,34.29
GND on Top Layer "GND_TOP" (solid, remove dead copper, pour order 0): -13.335,34.29 13.335,34.29 13.335,0 -13.335,0
GND on Third Layer "GND_3RD" (solid, remove dead copper, pour order 1): -13.335,34.29 13.335,34.29 13.335,0 -13.335,0
GND on Fourth Layer "GND_4TH" (solid, remove dead copper, pour order 2): 13.335,34.29 -13.335,34.29 -13.335,0 13.335,0
GND on Ground Plane 2 (split plane): 12.825,0.51 -12.825,0.51 -12.825,33.78 12.825,33.78
GND on Ground Plane 1 (split plane): 12.825,0.51 -12.825,0.51 -12.825,33.78 12.825,33.78

## Silkscreen, mask and mechanical layers (free items; w line width, h text height)
Bottom Overlay:
  region: 11.786,7.01 11.786,14.783 6.629,14.783 6.629,7.01
  text ".Project_Group" at 9.881,16.231 h1.02 r270
  text ".Project_Global" at 6.325,6.604 h1.02 r270
Board Outline:
  the board outline again, w0.254
Manufacturing Notes:
  lines w0.254: 17.764,-20.405 17.764,36.854 ; 17.764,-16.465 77.487,-16.465 ; 17.764,-12.676 77.487,-12.676 ; 17.764,-12.655 77.487,-12.655 ; 17.764,-8.866 77.487,-8.866 ; 17.764,-1.246 77.487,-1.246 ; 31.734,-20.405 31.734,36.854 ; 31.734,-12.676 44.434,-12.676 ; 31.734,-5.056 44.434,-5.056 ; 44.434,-20.405 44.434,36.854 ; 50.817,-20.275 63.517,-20.275 ; 50.817,-12.655 63.517,-12.655 ; 54.594,-20.405 54.594,36.854 ; 54.594,-5.056 68.564,-5.056 ; 68.564,-20.405 68.564,36.854 ; 75.987,36.854 77.487,36.854 ; 77.454,-20.405 77.454,36.854 77.454,40.664 ; 77.487,2.564 17.764,2.564 17.764,6.374 77.487,6.374 ; 77.487,10.184 17.764,10.184 17.764,13.994 77.487,13.994 ; 77.487,17.804 17.764,17.804 17.764,21.614 77.487,21.614 ; 77.487,25.424 17.764,25.424 17.764,29.234 77.487,29.234 ; 77.487,33.044 17.764,33.044 17.764,36.854 ; 77.487,40.664 17.764,40.664 17.764,36.854 ; 17.764,36.854 77.487,36.854 ; 17.764,36.854 31.734,36.854 ; 31.734,36.854 31.734,40.664 44.434,40.664 44.434,36.854 ; 44.434,36.854 54.594,36.854 ; 44.434,36.854 54.594,36.854 ; 54.594,36.854 54.594,40.664 68.564,40.664 68.564,36.854 ; 68.564,36.854 77.487,36.854 ; 68.564,36.854 77.487,36.854 ; 17.764,-20.275 77.487,-20.275 17.764,-20.275 ; 17.764,-5.056 77.487,-5.056 17.764,-5.056
  text "Type" at 21.828,38.41 h1.52
  text "Material" at 35.29,38.41 h1.52
  text "Weight" at 47.482,38.41 h1.52
  text "Dk" at 72.374,38.41 h1.52
  text "Thickness" at 58.15,38.378 h1.52
  text "Top Overlay" at 19.459,34.314 h1.52
  text "0.01 mm" at 58.166,30.581 h1.52
  text "3.5" at 71.78,30.53 h1.52
  text "Top Solder" at 19.459,30.489 h1.52
  text "0.0175 mm" at 57.734,27.813 h1.52
  text "0.5 oz" at 47.777,27.127 h1.52
  text "Top Layer" at 19.459,26.694 h1.52
  text "(Plating to 1 oz)" at 56.794,26.01 h1.52
  text "2116 RC58%" at 33.909,23.165 h1.52
  text "0.1195 mm" at 58.471,23.063 h1.52
  text "4.45" at 71.73,23.063 h1.52
  text "Dielectric 1" at 19.914,22.977 h1.52
  text "Second Layer" at 19.736,19.293 h1.52
  text "1 oz" at 47.625,19.126 h1.52
  text "0.035 mm" at 57.887,18.999 h1.52
  text "Core" at 36.154,15.534 h1.52
  text "Core 1" at 19.914,15.519 h1.52
  text "0.43 mm" at 58.166,15.342 h1.52
  text "4.6" at 71.907,15.265 h1.52
  text "1 oz" at 47.574,11.532 h1.52
  text "0.035 mm" at 58.318,11.48 h1.52
  text "Third Layer" at 19.459,11.454 h1.52
  text "Dielectric 2" at 19.482,7.813 h1.52
  text "4.74" at 71.111,7.742 h1.52
  text "7628 RC 46%" at 34.214,7.696 h1.52
  text "0.175 mm" at 57.937,7.671 h1.52
  text "1 oz" at 47.335,4.111 h1.52
  text "0.035 mm" at 58.079,4.06 h1.52
  text "Fourth Layer" at 19.459,3.834 h1.52
  text "0.43 mm" at 58.776,0.61 h1.52
  text "Core 2" at 20.069,0.236 h1.52
  text "Core" at 36.271,0.127 h1.52
  text "4.6" at 72.085,-0.026 h1.52
  text "Fifth Layer" at 20.008,-3.596 h1.52
  text "1 oz" at 47.691,-3.89 h1.52
  text "0.035 mm" at 58.435,-3.941 h1.52
  text "Dielectric 3" at 20.069,-7.561 h1.52
  text "0.1195 mm" at 58.217,-7.595 h1.52
  text "2116 RC58%" at 34.239,-7.671 h1.52
  text "4.45" at 71.298,-7.697 h1.52
  text "0.0175 mm" at 58.191,-10.338 h1.52
  text "0.5 oz" at 47.727,-11.201 h1.52
  text "Sixth Layer" at 19.957,-11.216 h1.52
  text "(Plating to 1 oz)" at 56.21,-11.887 h1.52
  text "Bottom Solder" at 19.304,-14.783 h1.52
  text "3.5" at 71.679,-14.859 h1.52
  text "0.01 mm" at 59.106,-15.418 h1.52
  text "Bottom Overlay" at 19.355,-18.618 h1.52